# Altium PCB Backplane.PcbDoc
Units mil, origin at the board's own origin, x right, y up, seen from the top; angles counter-clockwise.
Board outline 5500 x 3340 mil, 2 copper layers (Top Layer, Bottom Layer); 5 components, 52 nets, 307 pads, 215 vias.
Unrouted connection lines stored in the file: 2.
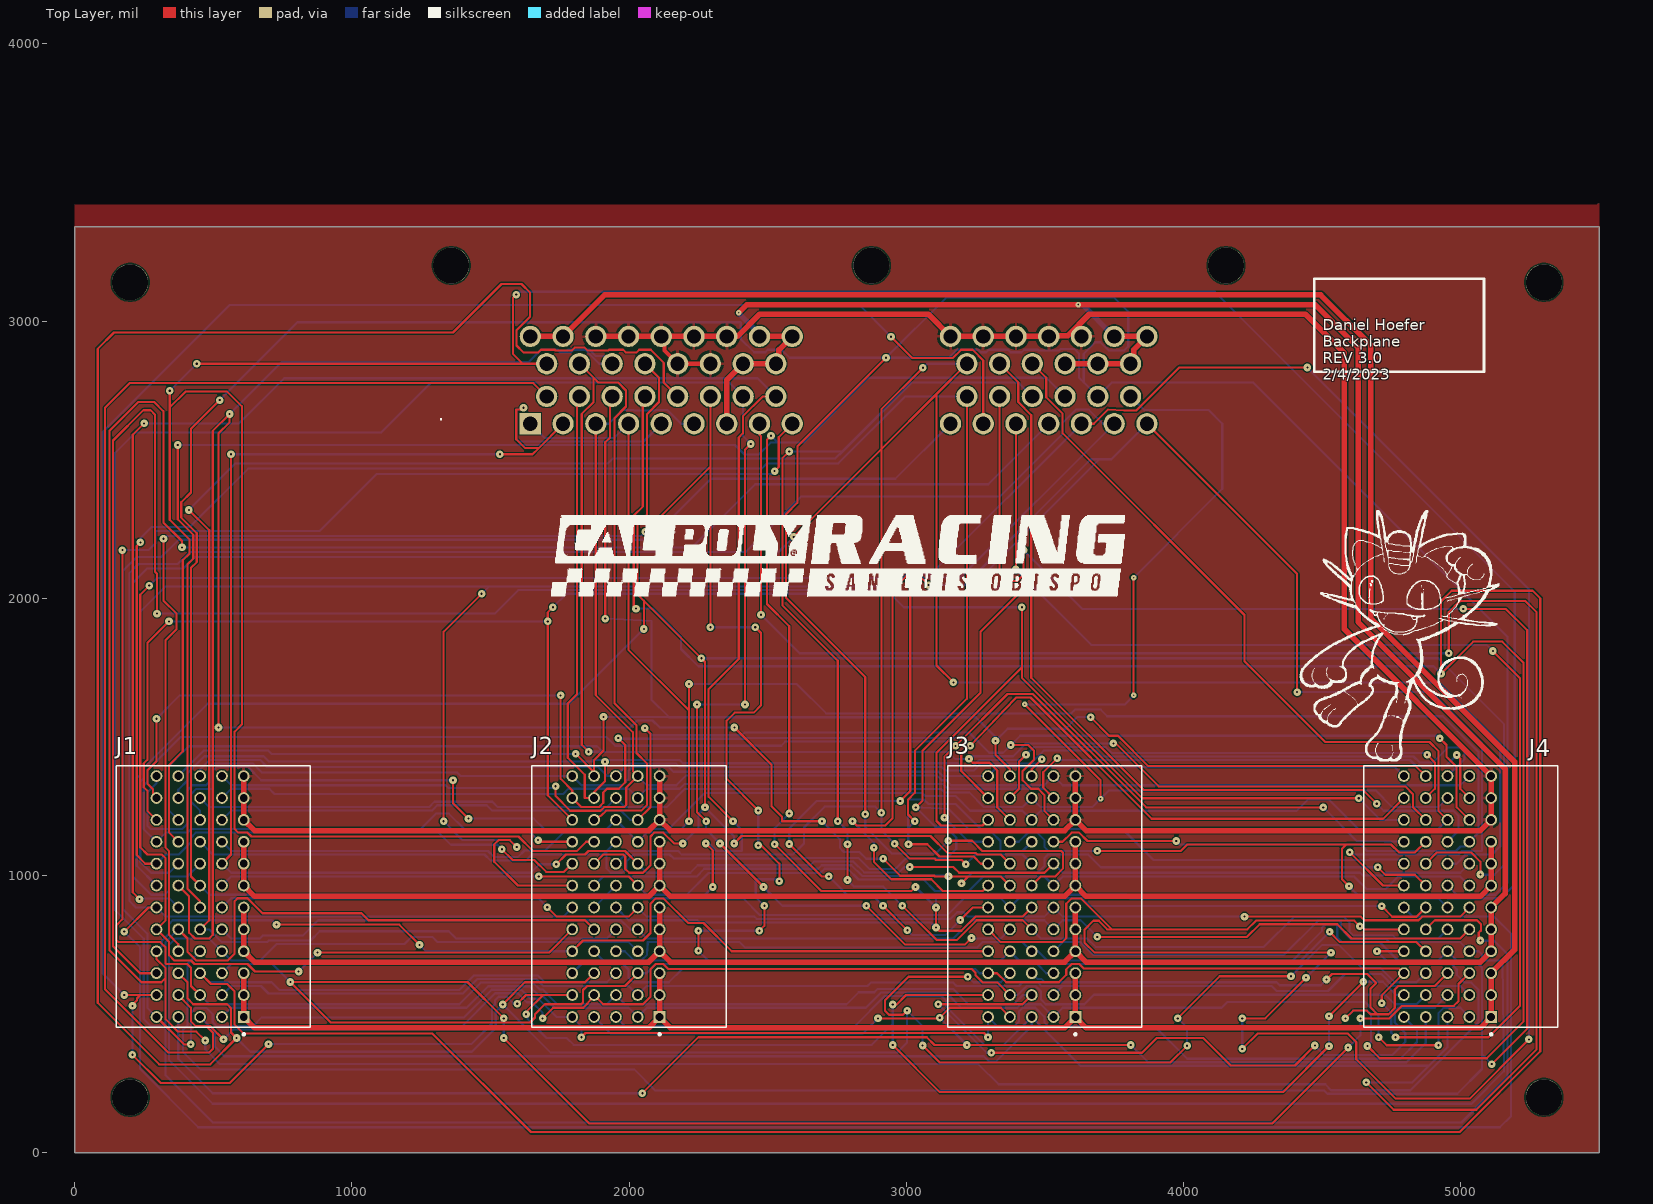
[diagram p0: Top Layer view]
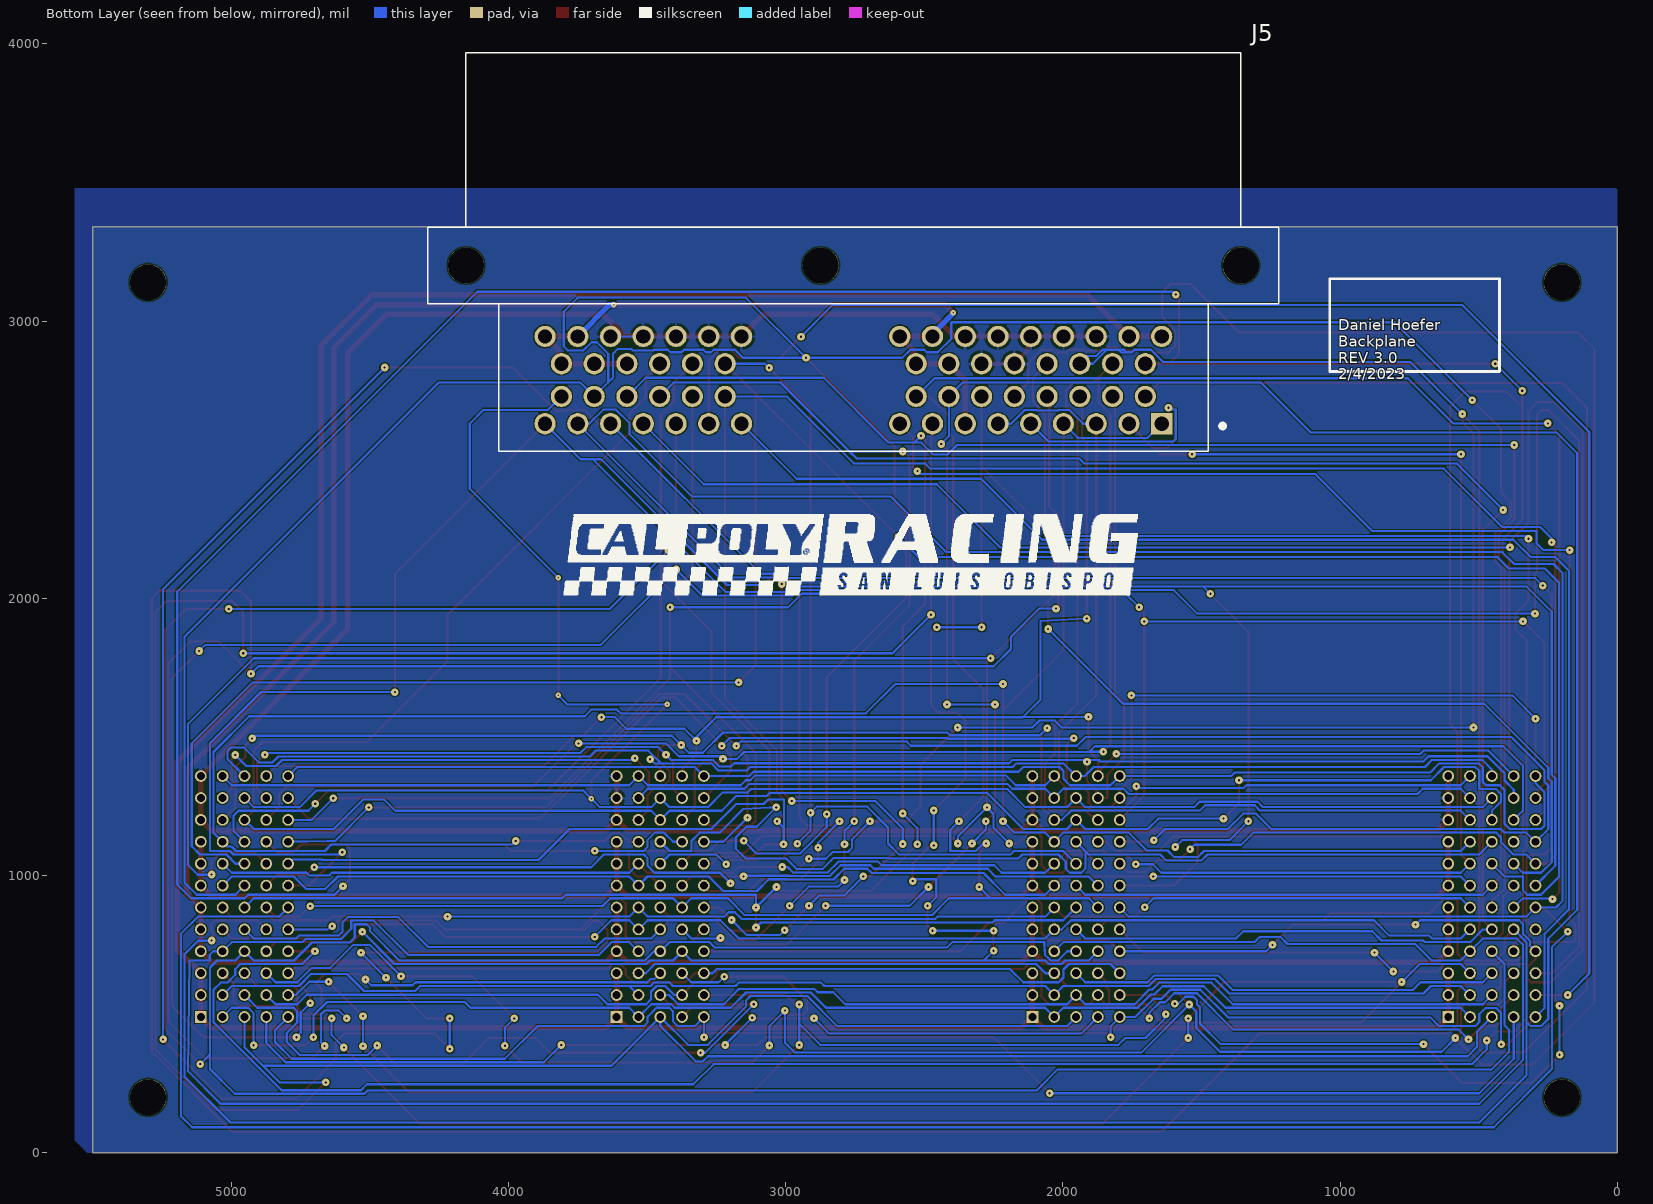
[diagram p1: Bottom Layer view, seen from below]

## Layer stack, top to bottom
Top Solder: solder mask 0.4, Solder Resist, Dk 3.5
Top Layer: signal copper 1.4
Dielectric 1: dielectric 12.6, FR-4, Dk 4.8
Bottom Layer: signal copper 1.4
Bottom Solder: solder mask 0.4, Solder Resist, Dk 3.5

## Board outline
0,0 0,3340 5500,3340 5500,0

## Design rules (kind name [scope] priority, off if disabled: settings)
Clearance [All] p1: gap=5 ignorepadtopadclearanceinfootprint=FALSE except(7.87: Arc-SMDPad Arc-THPad Track-SMDPad Track-THPad; 10: Arc-Via Track-Via; 12.99: Arc-Hole Track-Hole; 19.68: SMDPad-THPad THPad-THPad Via-Via Via-Hole)
ComponentClearance [All] p1: gap=5 collisioncheckmode=3 verticalgap=10 showdistances=FALSE
HoleSize [All] p1: absolutevalues=TRUE maxlimit=1200 minlimit=1 maxpercent=80.000 minpercent=20.000
PolygonConnect [All] p1: connectstyle=Relief reliefconductorwidth=10 reliefentries=4 polygonreliefangle="90 Angle" airgapwidth=10
RoomDefinition Backplane [InComponentClass('Backplane')] p1: confinementstyle=ConfineIn formatcopy=TRUE lockcomponents=FALSE outline 0,0 5515,0 5515,4040 0,4040
RoutingVias [All] p1: holewidth=7.87 width=27.56 viastyle="Through Hole" minholewidth=5.91 minwidth=19.68 maxholewidth=28 maxwidth=50
SilkToSilkClearance [All] p1: silktosilkclearance=5
SolderMaskExpansion [All] p1: expansion=4 istentingtop=FALSE
Width [All] p1: maxlimit=20 minlimit=5 preferedwidth=7.8 minimp=50.000000 maximp=50.000000 favimp=50.000000
27 further rules are at their usual default settings.

## Components (designator, comment, footprint, x,y, rotation, side; value= is the part's Value field where it differs from the comment)
J1 "5223002-2" TE_5223002-2 610,490 r270 top (schematic designator J2)
J2 "5223002-2" TE_5223002-2 2110,490 r270 top (schematic designator J3)
J3 "5223002-2" TE_5223002-2 3610,490 r270 top (schematic designator J1)
J4 "5223002-2" TE_5223002-2 5110,490 r270 top
J5 "6437288-3" TE_6437288-3 2874.02,3200.91 r0 bottom

## Footprints (in the part's own frame and the unit in brackets; to place one, negate y for a bottom-side part, rotate by r counter-clockwise, add the part's x,y. Pads: shape width x height; smd on the part's side, far side on the other; paste and mask are expansions set on the pad)
TE_5223002-2 [mm]
  rect 1.075x1.075 hole 0.725: 1(0,0)
  round 1.075 hole 0.725: 2(-2.007,0) 3(-4.013,0) 4(-6.02,0) 5(-8.026,0) 6(-10.033,0) 7(-12.04,0) 8(-14.046,0) 9(-16.053,0) 10(-18.059,0) 11(-20.066,0) 12(-22.073,0) 13(0,-2) 14(-2.007,-2) 15(-4.013,-2) 16(-6.02,-2) 17(-8.026,-2) 18(-10.033,-2) 19(-12.04,-2) 20(-14.046,-2) 21(-16.053,-2) 22(-18.059,-2) 23(-20.066,-2) 24(-22.073,-2) 25(0,-4) 26(-2.007,-4) 27(-4.013,-4) 28(-6.02,-4) 29(-8.026,-4) 30(-10.033,-4) 31(-12.04,-4) 32(-14.046,-4) 33(-16.053,-4) 34(-18.059,-4) 35(-20.066,-4) 36(-22.073,-4) 37(0,-6) 38(-2.007,-6) 39(-4.013,-6) 40(-6.02,-6) 41(-8.026,-6) 42(-10.033,-6) 43(-12.04,-6) 44(-14.046,-6) 45(-16.053,-6) 46(-18.059,-6) 47(-20.066,-6) 48(-22.073,-6) 49(0,-8) 50(-2.007,-8) 51(-4.013,-8) 52(-6.02,-8) 53(-8.026,-8) 54(-10.033,-8) 55(-12.04,-8) 56(-14.046,-8) 57(-16.053,-8) 58(-18.059,-8) 59(-20.066,-8) 60(-22.073,-8)
  silkscreen extent -23.01,-11.7 1.69,6.1
TE_6437288-3 [mm]
  rect 1.95x1.95 hole 1.3: 1(-31.25,14.5)
  round 1.95 hole 1.3: 2(-28.25,14.5) 3(-25.25,14.5) 4(-22.25,14.5) 5(-19.25,14.5) 6(-16.25,14.5) 7(-13.25,14.5) 8(-10.25,14.5) 9(-7.25,14.5) 10(-29.75,12) 11(-26.75,12) 12(-23.75,12) 13(-20.75,12) 14(-17.75,12) 15(-14.75,12) 16(-11.75,12) 17(-8.75,12) 18(-29.75,9) 19(-26.75,9) 20(-23.75,9) 21(-20.75,9) 22(-17.75,9) 23(-14.75,9) 24(-11.75,9) 25(-8.75,9) 26(-31.25,6.5) 27(-28.25,6.5) 28(-25.25,6.5) 29(-22.25,6.5) 30(-19.25,6.5) 31(-16.25,6.5) 32(-13.25,6.5) 33(-10.25,6.5) 34(-7.25,6.5) 35(7.25,14.5) 36(10.25,14.5) 37(13.25,14.5) 38(16.25,14.5) 39(19.25,14.5) 40(22.25,14.5) 41(25.25,14.5) 42(8.75,12) 43(11.75,12) 44(14.75,12) 45(17.75,12) 46(20.75,12) 47(23.75,12) 48(8.75,9) 49(11.75,9) 50(14.75,9) 51(17.75,9) 52(20.75,9) 53(23.75,9) 54(7.25,6.5) 55(10.25,6.5) 56(13.25,6.5) 57(16.25,6.5) 58(19.25,6.5) 59(22.25,6.5) 60(25.25,6.5)
  round 3.3 hole 3.3 unplated: ""(-38.5,0) ""(0,0) ""(32.5,0)
  silkscreen extent -42,-19.5 36,17

## Part data
J1 J2 J3 J4: Package=None, Availability=Unavailable, MP=5223002-2, Price=None
J5: "Rectangular Power Connector, Super Seal Series, Through Hole, Receptacle, 60, 1.5 mm, Pin", Package=None, EU_RoHS_Compliance=Compliant, MF="TE Connectivity", MP=6437288-3, SnapEDA_Link=https://www.snapeda.com/parts/6437288-3/TE%20Connectivity%20AMP%20Connectors/view-part/401864/?ref=snap, TE_purchase_URL=https://www.te.com/usa-en/product-6437288-3.html?te_bu=Cor&te_type=disp&te_campaign=seda_glo_cor-seda-global-disp-prtnr-fy19-seda-model-bom-cta_sma-317_1&elqCampaignId=32493

## Free pads (board coordinates)
  round 130 hole 130 unplated: 2(200,200) 2(200,3140) 2(5300,200) 2(5300,3140)

## Via types
v1: diameter 27.56, hole 7.87, Top Layer to Bottom Layer, 209 vias
v2: diameter 19.68, hole 5.91, Top Layer to Bottom Layer, 6 vias

## Nets (pads, with @x,y where several pads share a name; then routed paths per layer and width w, separated by ;. In a path a pad name is that pad's centre, name@x,y a point inside that pad or via, vN(x,y) a via of type N, cw(c..) or ccw(c..) an arc to the next point about the centre after c; other vN are vias at no path point)
3.3V: J1.7 J1.8 J1.9 J2.7 J2.8 J2.9 J3.7 J3.8 J3.9 J4.7 J4.8 J4.9 | length 5229.1
  Top Layer w20: J1.9 J1.8 J1.7 649.04,924.94 2070.96,924.94 J2.7 ; J2.9 J2.8 J2.7 ; J3.9 J3.8 J3.7 ; J4.9 J4.8 J4.7 5070.96,924.94 3649.04,924.94 J3.7 ; J2.7 2149.04,924.94 3570.96,924.94 J3.7
5V: J1.4 J1.5 J1.6 J2.4 J2.5 J2.6 J3.4 J3.5 J3.6 J4.4 J4.5 J4.6 J5.7 J5.24 J5.25 J5.33 J5.34 J5.51 J5.52 J5.53 J5.59 J5.60 | length 11172.2
  Top Layer w20: J1.4 649.04,687.93 2070.96,687.93 J2.4 2149.04,687.93 3570.96,687.93 J3.4 3649.04,687.93 5070.96,687.93 J4.4 ; J1.4 J1.5 J1.6 ; J2.4 J2.5 J2.6 ; J5.7 2352.36,2787.52 J5.24 J5.25 2540.23,2857.27 2540.23,2896.64 J5.34 J5.33 ; v2(2395,3030) 2425,3060 v2(3620,3060) 4475,3060 4630,2905 4630,1915 5160,1385 5160,935 J4.6 J4.5 J4.4 ; J5.51 J5.52 J5.53 3819.75,2857.27 3819.75,2896.64 J5.60 J5.59 ; J3.4 J3.5 J3.6
  Bottom Layer w20: v2(2395,3030) 2470.47,2954.53 J5.33 ; v2(3620,3060) 3635,3060 J5.59
8.4V: J1.1 J1.2 J1.3 J2.1 J2.2 J2.3 J3.1 J3.2 J3.3 J4.1 J4.2 J4.3 J5.26 J5.27 | length 10914.7
  Top Layer w20: J1.1 649.04,450.92 2070.96,450.92 J2.1 2149.04,450.92 3570.96,450.92 J3.1 3649.04,450.92 5070.96,450.92 J4.1 ; J1.1 J1.2 J1.3 ; J5.26 J5.27 1911.81,3095 4495,3095 4675,2915 4675,1930 5195,1410 5195,732.99 J4.3 J4.2 J4.1 ; J2.1 J2.2 J2.3 ; J3.1 J3.2 J3.3
GND: J1.10 J1.11 J1.12 J2.10 J2.11 J2.12 J3.10 J3.11 J3.12 J4.10 J4.11 J4.12 J5.22 J5.23 J5.28 J5.29 J5.30 J5.31 J5.32 J5.54 J5.55 J5.56 J5.57 J5.58 | length 10191.2
  Top Layer w15: J5.30 2127.96,2933.18 2127.96,2893.81 J5.22 J5.23
  Top Layer w20: J1.12 J1.11 J1.10 649.04,1161.95 2070.96,1161.95 J2.10 ; J5.28 J5.29 J5.30 J5.31 J5.32 2390.91,2945 2470.91,3025 3079.45,3025 J5.54 J5.55 J5.56 J5.57 3515.95,2947.17 3582.17,2947.17 3660,3025 4440,3025 4580,2885 4580,1889.02 J4.12 J4.11 J4.10 5070.96,1161.95 3649.04,1161.95 J3.10 ; J2.12 J2.11 J2.10 ; J3.12 J3.11 J3.10 ; J2.10 2149.04,1161.95 3570.96,1161.95 J3.10
  Bottom Layer w7.8: J5.57 J5.58
NetJ1_13: J1.13 J2.13 J3.13 J4.13 | length 4945.6
  Top Layer w7.8: v1(4704,417) 4732.87,388.13 v1(4919.58,388.13)
  Bottom Layer w7.8: J1.13 564.26,523 1413.42,523 1491.5,601.08 1639.84,601.08 1670.09,570.83 1683.13,570.83 1730.96,523 1998.26,523 J2.13 2064.46,523.2 2854.64,523.2 2909.92,578.48 3143.44,578.48 3198.72,523.2 3400.54,523.2 3413.14,535.8 3485.46,535.8 J3.13 3564.26,523 4137,523 4158,544 4655,544 4704,495 v1(4704,417) ; v1(4919.58,388.13) 4919.58,503.64 4938.94,523 4998.26,523 J4.13
NetJ1_14: J1.14 J2.14 J3.14 J4.14 | length 4715.3
  Bottom Layer w7.8: J1.14 564.24,602 672,602 699.21,574.79 1400.43,574.79 1452.32,626.68 1665.44,626.68 1690.12,602 1998.28,602 J2.14 2064.24,602 2860.24,602 2872.12,613.88 3169.2,613.88 3181.08,602 3406.78,602 3419.54,614.75 3473.76,614.75 3486.51,602 3564.24,602 ; J3.14 3564.24,602 ; J4.14 4998.28,602 4756.08,602 4713.34,644.74 4582.45,644.74 4521.38,583.67 4336.8,583.67 4318.46,602 3564.24,602
NetJ1_15: J1.15 J2.15 J3.15 J4.15 | length 8038.5
  Top Layer w7.8: v1(1548,414) 1856,106 4319.88,106 v1(4593.88,380) ; v1(1548,485) 1417,616 v1(778,616) 924,470 1642.5,470 1660.32,487.82 1660.32,500.32 1696.08,536.08 1828,536.08 1834,542.08 1834,587.5 1848.5,602 1985.27,602 J2.15 ; v1(4638,485) 4743,485 4788,530 4975,530 4992.27,547.27 4992.27,609 J4.15
  Bottom Layer w7.8: J1.15 564.27,681 713,681 v1(778,616) ; v1(1548,414) v1(1548,485) ; J2.15 2062.99,647.99 2096,681 3472.17,681 3505.17,647.99 J3.15 ; v1(4593.88,380) 4638,424.12 v1(4638,485)
NetJ1_16: J1.16 J2.16 J3.16 J4.16 | length 9326.4
  Bottom Layer w7.8: J2.16 1998.27,760 1309,760 1290,779 1216,779 1190,753 729,753 670,694 564.27,694 J1.16 485.52,772.74 362.5,772.74 340.84,751.09 340.84,334.24 498.09,177 5039,177 5155.8,293.8 5150.53,694.07 5078,694.07 5078,714 5064.99,727.01 J4.16 4998.27,760 4743.48,760 4731.96,771.52 4603.76,771.52 4567.48,807.8 4567.48,837.48 4486.07,837.48 4362.11,713.52 3675,713.52 3628.52,760 3564.25,760 J3.16
NetJ1_17: J1.17 J2.17 J3.17 J4.17 | length 4702.3
  Top Layer w7.8: v1(3689,779) 4228.89,779 4274.57,824.68 4554.68,824.68 4606.36,773 4998.28,773 J4.17
  Bottom Layer w7.8: J1.17 564.24,773 668,773 678.44,783.44 822.44,783.44 878,839 1971,839 2004.02,805.98 J2.17 2064.24,773 2411.81,773 2412.29,772.52 3147,772.52 3147.87,773.39 3170.39,773.39 3236,839 3498.24,839 J3.17 3564.28,839 3629,839 v1(3689,779)
NetJ1_18: J1.18 J2.18 J3.18 J4.18 | length 4640.1
  Top Layer w7.8: v1(1705,886) 1739,852 1998.26,852 J2.18 ; v1(4220,852) 4640,852 4653.08,838.92 4848,838.92 4861.08,852 4998.26,852 J4.18
  Bottom Layer w7.8: J1.18 564.26,918 1673,918 v1(1705,886) ; J2.18 2064.26,852 2452,852 2460,844 3159.74,844 3183.75,868.01 3206.22,868.01 3222.23,852 3498.26,852 J3.18 3564.26,852 v1(4220,852)
NetJ1_19: J1.19 J2.19 J3.19 J4.19 | length 4714.2
  Top Layer w7.8: v1(1674,997) 1998.28,997 J2.19
  Bottom Layer w7.8: J1.19 564.24,997 v1(1674,997) ; J2.19 2064.28,931 2208.32,931 2286.53,1009.21 2689.85,1009.21 2705.32,1024.68 2788.99,1024.68 2827.75,985.92 2999.13,985.92 2999.89,986.68 3061,986.68 3103.36,944.32 3224.88,944.32 3277.56,997 3498.28,997 J3.19 3564.24,997 4615.04,997 4660.52,951.52 4729.52,951.52 4775,997 4998.28,997 J4.19
NetJ1_20: J1.20 J2.20 J3.20 J4.20 J5.2 J5.5 | length 8330.1
  Top Layer w7.8: J1.20 564.2,1075.93 564.2,2519.8 v1(564,2520) ; v1(1534,2520) 1651.77,2520 1673.77,2542 ; v1(1619,2688) 1612,2681 1593,2681 1593,2574 1625,2542 1673.77,2542 ; v1(1737,1041) 1772.27,1076.27 1840.78,1076.27 1853.5,1089 1985.25,1089 J2.20 ; J5.2 1673.77,2542 ; v1(3012.76,1031) 3169.78,1031 3190.78,1010 3498.27,1010 J3.20
  Bottom Layer w7.8: J1.20 564.25,1010 1644.72,1010 1675.72,1041 v1(1737,1041) ; v1(564,2520) v1(1534,2520) ; v1(1619,2688) 1612,2681 1593,2681 1593,2575 1601.8,2566.2 2052.3,2566.2 J5.5 ; J2.20 2064.25,1010 2220.4,1010 2247.68,1037.28 2653.72,1037.28 2666.72,1050.28 2809.79,1050.28 2848.55,1011.52 2974.29,1011.52 2993.77,1031 v1(3012.76,1031) ; J3.20 3564.25,1010 4637.32,1010 4647.32,1000 4718.68,1000 4728.68,1010 4998.27,1010 J4.20
NetJ1_21: J1.21 J2.21 J3.21 J4.21 J5.1 J5.4 | length 8658
  Top Layer w7.8: J5.4 1998.03,1991.85 1997.32,1991.14 1997.32,1814.68 2216,1596 ; v1(2216,1196) 2216,1596 ; v1(2216,1691) 2216,1596 ; J3.21 3563.42,1122.01 3596.36,1154.94 3623.64,1154.94 3653.59,1125 v1(3974,1125)
  Bottom Layer w7.8: J1.21 564.27,1089 1491.29,1089 1513.64,1066.65 1598.57,1066.65 1622.68,1090.75 1697.75,1090.75 1762,1155 1998.27,1155 J2.21 2064.25,1155 2175,1155 v1(2216,1196) ; J5.1 1694.74,2579 1946.99,2579 J5.4 ; v1(2216,1691) 2605,1691 2710.72,1585.28 3595.28,1585.28 3608.68,1598.68 3701.32,1598.68 3725,1575 4935,1575 5064.2,1445.8 5064.2,1154.94 J4.21 5014.25,1105 4999,1105 4983,1089 4662.18,1089 4639,1112.18 3986.82,1112.18 v1(3974,1125)
NetJ1_22: J1.22 J2.22 J3.22 J4.22 | length 5601.9
  Top Layer w7.8: J2.22 2077.06,1246.79 2077.06,1511.94 v1(2057,1532) ; v1(3377,1471) 3439.5,1471 3460.5,1450 3460.5,1418.39 3419.58,1377.47 3419.58,1343.42 3450,1313 3476,1313 3498,1291 3498,1234.24 J3.22 ; v1(4925,1495) 4949,1471 4949,1428.46 4985.46,1392 4985.46,1246.79 J4.22
  Bottom Layer w7.8: J1.22 564.54,1234.26 1288.75,1234.26 1308.16,1253.68 1486.92,1253.68 1506.34,1234.26 1970.72,1234.26 2004,1200.98 J2.22 ; v1(2057,1532) 2082.68,1506.32 2407,1506.32 2416.68,1516 3226,1516 3298.8,1443.2 3349.2,1443.2 v1(3377,1471) 3410.68,1504.68 4915.32,1504.68 v1(4925,1495)
NetJ1_23: J1.23 J2.23 J3.23 J4.23 | length 4907.7
  Top Layer w7.8: J3.23 3494,1317.26 3494,1373 v1(3544,1423) ; v1(4986.01,1434.99) 4998.26,1422.74 4998.26,1313 J4.23
  Bottom Layer w7.8: J1.23 564.26,1313 702,1313 720.87,1294.13 1762,1294.13 1780.87,1313 1998.26,1313 J2.23 2064.26,1313 2183.24,1313 2201.12,1330.88 3131.88,1330.88 3149.76,1313 3498.26,1313 J3.23 ; v1(3544,1423) 3550.12,1416.88 4817.16,1416.88 4838.52,1395.52 4946.54,1395.52 v1(4986.01,1434.99)
NetJ1_24: J1.24 J2.24 J3.24 J4.24 J5.3 J5.6 | length 6481.2
  Top Layer w7.8: v1(1735,1322) 1735,1287 1788,1234 1897,1234 1910.06,1247.06 1982.06,1247.06 1990,1255 1990,1317.76 J2.24 2013.65,1376.63 2013.65,1517.35 1879.92,1651.08 J5.3
  Bottom Layer w7.8: J1.24 564.28,1326 1337.75,1326 1347.43,1316.32 1729.32,1316.32 v1(1735,1322) ; J5.3 1927.09,2630.04 1977.25,2680.2 2016.8,2680.2 2019,2678 2093.16,2678 2095.36,2680.2 2136.92,2680.2 2187.08,2630.04 J5.6 ; J2.24 2064.28,1326 2170.64,1326 2206.27,1361.63 3109.42,1361.63 3127.37,1343.68 3144.68,1343.68 3162.36,1326 3498.24,1326 J3.24 3564.28,1326 4998.24,1326 J4.24
NetJ1_25: J1.25 J2.25 J3.25 J4.25 J5.8 | length 12883.5
  Top Layer w7.8: J5.8 2470.47,2591 2476,2585.47 v1(2476,1941) ; v1(4659,254) 4758,155 5056,155 5274,373 5274,1950 5233.32,1990.68 4997.68,1990.68 4957,1950 v1(4957,1802)
  Bottom Layer w7.8: J1.25 506,436.52 506,382 539.48,348.52 3279.59,348.52 3298.28,329.83 3325,329.83 3452.52,457.35 J3.25 ; J2.25 1985.52,457 2814.04,457 2922.72,565.68 3127,565.68 3142.68,550 3142.68,528.32 3281.68,389.32 3351.84,389.32 J3.25 ; v1(2476,1941) 2615,1802 v1(4957,1802) ; v1(4659,254) 4826,254 4885.92,313.92 ; J4.25 4952.52,380.52 4885.92,313.92 ; J3.25 3628.6,313.92 4885.92,313.92
NetJ1_26: J1.26 J2.26 J3.26 J4.26 J5.9 | length 10305.9
  Top Layer w7.8: v1(172,2174) 172,842.68 151.32,822 151.32,766.62 158,759.94 308.68,759.94 327.98,740.65 327.98,683.63 330.67,680.93 406.66,680.93 419.58,668 419.58,601.95 J1.26 ; v1(2525,2459) 2540,2474 2540,2581.46 J5.9 ; v1(3115,536) 3419.5,536 J3.26 ; v1(3307,361) 3850,361 3903,414 4071,414 4170,315 4402,315 v1(4474,387)
  Bottom Layer w7.8: v1(172,2174) 266,2174 292,2200 292,2243 884,2243 1090,2449 2515,2449 v1(2525,2459) ; J1.26 485.54,536 1387.24,536 1465.12,613.88 1652.64,613.88 1677.64,588.88 1688.4,588.88 1741.28,536 1919.5,536 J2.26 1985.54,536 2784.9,536 2827.98,579.08 2884.92,579.08 2897.12,591.28 3168.44,591.28 3223.72,536 3387.74,536 3420.76,569.02 J3.26 ; v1(3115,536) 3290,361 v1(3307,361) ; v1(4474,387) 4508.68,352.32 4752.32,352.32 4800,400 4800,432 4762.1,469.9 4762.1,510.1 4775,523 4906.5,523 J4.26
NetJ1_27: J1.27 J2.27 J3.27 J4.27 J5.13 | length 17375.8
  Top Layer w7.8: J1.27 491.51,609 550,609 577,582 577,462.5 609.5,430 1291,430 1646,75 4996,75 5287,366 5287,2000 5259.52,2027.48 4967.48,2027.48 4929,1989 v1(4929,1728) 5045,1844 5150,1844 5227,1767 5227,474 5094.32,341.32 4707.68,341.32 v1(4663.5,385.5) ; v1(2025,1963) 2017,1971 2017,2299 2049,2331 2049,2702 2057.09,2702 J5.13 ; v1(4516,625) 4535.74,644.74 4662.76,644.74 4695,612.5 4674.5,592 4674.5,525 4699.5,500 ; v1(4584,485) 4612,513 4661.5,513 4674.5,500 4699.5,500 ; J4.27 4906.53,602 4775,602 4762,589 4762,522.1 4739.9,500 4699.5,500
  Bottom Layer w7.8: J1.27 485.51,615 710.09,615 737.5,587.59 1387.63,587.59 1439.52,639.48 1670.88,639.48 1695.36,615 1919.53,615 J2.27 ; v1(2025,1963) 2086.68,1963 2187.5,1862.18 2187.5,1817.5 2250,1755 4902,1755 v1(4929,1728) ; J3.27 3472.96,627.55 3486.76,627.55 3499.31,615 4335.62,615 4346.3,604.32 4495.32,604.32 v1(4516,625) ; v1(4584,485) 4612,513 4664,513 4676.32,500.68 4676.32,398.32 v1(4663.5,385.5)
NetJ1_28: J1.28 J2.28 J3.28 J4.28 J5.43 | length 13390
  Top Layer w7.8: J5.43 3336.61,2096.39 3370.2,2062.8 3400,2062.8 3423,2085.8 v1(3423,2174) ; v1(5009,1962) 5163,1962 5240,1885 5240,448 v1(5112,320)
  Bottom Layer w7.8: J1.28 406.78,681.27 406.78,459.73 391.32,444.26 391.32,363.04 453.39,300.97 2018.17,300.97 2094.13,225 4507.62,225 4519.64,212.99 4987.99,212.99 5077,302 5077,355 ; J2.28 1984.14,727.01 2017.08,694.07 2045.06,694.07 2065,714.01 2067.4,760 2398.89,760 2418.89,740 3255,740 3275,760 3419.53,760 J3.28 3475,727.01 3508.01,694 4393.64,694 4499.32,799.68 4499.32,811.5 4512.5,824.68 4554.68,824.68 4554.68,776.76 4572.72,758.72 4708.97,758.72 4773.69,694 4919.51,694 J4.28 4985.53,694 5051.54,694 5077,668.54 5077,355 ; v1(3423,2174) 3635,1962 v1(5009,1962) ; v1(5112,320) 5077,355
NetJ1_29: J1.29 J2.29 J3.29 J4.29 J5.44 | length 10649.5
  Top Layer w7.8: v1(412,2319) 485.46,2245.54 485.46,838.92 J1.29 ; v1(2578,2530) 2553,2505 2553,1974.83 2753,1774.83 v1(2753,1196) ; v1(2788,983.97) v1(2788,1113) ; v1(2985.99,891) 3108.99,768 3183.5,768 3254.42,838.92 3419.58,838.92 J3.29
  Bottom Layer w7.8: v1(412,2319) 580,2487 1924,2487 1942,2505 2744.91,2505 2769.91,2530 ; J1.29 484.68,805.98 530.66,760 695,760 701,766 851,766 884,799 1350,799 1376,773 1919.54,773 J2.29 ; v1(2578,2530) 2769.91,2530 ; v1(2753,1196) 2788,1161 v1(2788,1113) ; v1(2788,983.97) 2811.65,960.32 2916.67,960.32 v1(2985.99,891) ; J3.29 3485.5,773 3653.32,773 3683.32,743 4290.63,743 4397.91,850.28 4580.28,850.28 4598.32,832.24 4598.32,798.5 4612.5,784.32 4754.68,784.32 4766,773 4919.54,773 J4.29 ; J5.44 3404.19,2779 3018.91,2779 2769.91,2530
NetJ1_30: J1.30 J2.30 J3.30 J4.30 J5.45 | length 10889.3
  Top Layer w7.8: v1(371.52,2553.4) 371.52,2285.06 427.48,2229.1 427.48,2143.52 406.72,2122.76 406.72,952.6 452.52,906.79 J1.30 ; v1(2512,2587) 2497.32,2572.32 2497.32,1980.04 2578,1899.36 v1(2578,1224) ; v1(2525,1113) 2694,944 3018,944 v1(3033,959) ; v1(3107,885) v1(3107,813) 3118.99,801.01 3198.4,801.01 3249.39,852 3419.52,852 J3.30
  Bottom Layer w7.8: v1(371.52,2553.4) 2382.24,2553.4 2416.64,2519 2468,2519 2511,2562 2537,2562 ; J2.30 1998.52,839 2246.4,839 2254.71,830.69 3089.31,830.69 v1(3107,813) ; v1(2512,2587) 2537,2562 ; v1(2525,1113) 2525,1171 v1(2578,1224) ; v1(3033,959) v1(3107,885) 3107,931 3794,931 3807,918 4919.52,918 J4.30 ; J5.45 3505.3,2796 2863,2796 2629,2562 2537,2562
NetJ1_31: J1.31 J2.31 J3.31 J4.31 J5.46 | length 14280.1
  Top Layer w7.8: J1.31 419.52,997.02 419.52,2109.96 440.28,2130.72 440.28,2235.36 384.32,2291.32 384.32,2346.68 419.52,2381.88 419.52,2611.52 v1(523.43,2715.43) ; v1(2851.74,1221) 2851.74,1716.37 2566,2002.11 2566,2304 2607,2345 2607,2548 v1(2927,2868) ; v1(3151.52,1125.48) 3237.63,1125.48 3274.11,1089 3559,1089 3565,1083 3565,1025 3537,997 3485.5,997 J3.31
  Bottom Layer w7.8: J1.31 485.54,931 1919.5,931 J2.31 ; v1(523.43,2715.43) 804,2996 2402,2996 2403,2995 2403,2936 2451,2888 2491,2888 2500,2897 2550.04,2897 2579.04,2868 v1(2927,2868) ; v1(2851.74,1221) 2851.74,1175.88 2947.94,1079.68 3105.72,1079.68 v1(3151.52,1125.48) ; J4.31 4985.54,931 5125,931 5168.54,974.54 5168.54,1862.01 4251.54,2779 3741.48,2779 J5.46 3640,2779.41 ; v1(2927,2868) 3154,2868 3183,2897 3260,2897 3269,2888 3288,2888 3297,2897 3367,2897 3376,2888 3416,2888 3425,2897 3475.24,2897 3477.4,2894.84 3552.79,2894.84 3557.95,2900 3605.95,2900 3622.99,2882.96 3622.99,2796.41 3640,2779.41 ; v1(2927,2868) 3144,3085 3750,3085 3801,3034 3801,2909.46 3786.38,2894.84 3729.22,2894.84 3700.06,2924 3681.83,2924 3640,2882.17 3640,2779.41
NetJ1_32: J1.32 J2.32 J3.32 J4.32 J5.48 | length 12071.1
  Top Layer w7.8: v1(2593.93,2222) 2910,2538.07 ; v1(2910,1227) 2910,2538.07 ; v1(2958,1115) 3011,1062 3101.71,1062 3107.42,1056.29 3199.71,1056.29 v1(3215,1041) ; v1(3060,2832) 2910,2682 2910,2538.07 ; v1(3170,1697) 3109,1758 3109,2737.07 ; J5.48 3109,2737.07 ; 2910,2538.07 3109,2737.07
  Bottom Layer w7.8: J1.32 406.73,997.2 340.78,997.2 340.78,946.78 325,931 275,931 210.9,995.1 210.9,2057.08 261.44,2107.62 391.58,2107.62 432.96,2149 2520.93,2149 v1(2593.93,2222) ; J2.32 1998.53,1089 2177.03,1089 2190.51,1075.52 2590.2,1075.52 2630.68,1116 2630.68,1173.52 2705.84,1248.68 2888.32,1248.68 v1(2910,1227) 2910,1163 v1(2958,1115) ; v1(3060,2832) 3074.57,2846.57 J5.48 ; v1(3170,1697) 4923,1697 5142.94,1477.06 5142.94,1105.94 5112.93,1075.93 5017.62,1075.93 4984.68,1042.99 J4.32 ; v1(3215,1041) 3250,1076 3419.51,1076 J3.32
NetJ1_33: J1.33 J2.33 J3.33 J4.33 J5.49 | length 7757.3
  Top Layer w7.8: v1(3034,1246) 3059,1271 3059,1451 3268,1660 3268,1880 3451,2063 ; J5.49 3404,2779.19 3404,2708.25 3451,2661.25 3451,2063 ; v1(4697,1259) 4646.87,1309.13 3855.5,1309.13 3451,1713.64 3451,2063
  Bottom Layer w7.8: J1.33 498.53,1076 1478.69,1076 1500.84,1053.85 1626.81,1053.85 1648.96,1076 1906.51,1076 1919,1088.49 ; J2.33 1919,1088.49 ; J3.33 3419.51,1089 3340,1089 3340,1125 3310,1155 3238.2,1155 3153.07,1240.13 3059,1246 v1(3034,1246) 3103.95,1176.05 3141.45,1176.05 3180,1137.5 3180,1097 3145,1062 2998.68,1062 2961,1024.32 2866.68,1024.32 2827,1064 2629,1064 2627,1062 2160,1062 2146,1076 2016,1076 1990,1050 1990,1025 1975,1010 1934,1010 1919,1025 1919,1088.49 ; v1(4697,1259) 4722,1234 4974,1234 4992,1216 4992,1161.49 J4.33
NetJ1_34: J1.34 J2.34 J3.34 J4.34 J5.50 | length 7554.9
  Top Layer w7.8: v1(1365,1344) 1365,1261.33 v1(1420.88,1205.45) ; J5.50 3505,2796.3 3505,2725.36 3564,2666.36 3564,2596 4220,1940 4220,1773 4511,1482 4887.52,1482 4919.52,1450 4919.52,1233.99 J4.34
  Bottom Layer w7.8: J1.34 452.52,1233.42 419.58,1266.36 419.58,1293.64 438.88,1312.94 498.32,1312.94 498.32,1377.78 512.5,1391.95 625.05,1391.95 673,1344 v1(1365,1344) ; v1(1420.88,1205.45) 1656.55,1205.45 1694,1168 1919.54,1168 J2.34 1985.5,1168 2143,1168 2273,1298 3057,1298 3068,1287 3178,1287 3231,1234 3419.5,1234 J3.34 3485.54,1234 4408,1234 4448,1274 4525,1274 4631,1168 4919.54,1168 J4.34
NetJ1_35: J1.35 J2.35 J3.35 J4.35 J5.47 | length 7045.8
  Top Layer w7.8: v2(3427.5,1617.5) 3700.84,1344.16 v2(3700.84,1276.84) ; v2(3820,1650) v2(3820,2075)
  Bottom Layer w7.8: J1.35 485.46,1247.06 1278.16,1247.06 1297.58,1266.48 1507.25,1266.48 1526.67,1247.06 1919.58,1247.06 J2.35 1985.52,1247 2135.48,1247 2200.56,1312.08 3125.08,1312.08 3137.08,1300.08 3226.95,1300.08 3280.03,1247 3419.52,1247 J3.35 3485.52,1247 3671,1247 v2(3700.84,1276.84) 3730.68,1306.68 4693.32,1306.68 4753,1247 4919.52,1247 J4.35 ; v2(3427.5,1617.5) 3787.5,1617.5 v2(3820,1650) ; J5.47 3857.32,2680.2 4090.23,2680.2 4140,2630.43 4140,2395 v2(3820,2075)
NetJ1_36: J1.36 J2.36 J3.36 J4.36 | length 4965.8
  Top Layer w7.8: J3.36 3452.52,1383.52 v1(3489,1420)
  Bottom Layer w7.8: J1.36 452.52,1382.57 487.5,1417.55 668.54,1417.55 694.09,1392 1888.46,1392 1921.44,1359.02 J2.36 1998.26,1404.75 2168.58,1404.75 2181.34,1392 3128,1392 3141,1379 3243.08,1379 3268.88,1404.8 3450,1404.8 ; v1(3489,1420) 3473.8,1404.8 3450,1404.8 ; J4.36 5013.69,1420.18 5013.69,1450 5001.02,1462.67 4955.35,1462.67 4901,1408.32 4851.32,1408.32 4829.96,1429.68 3706.88,1429.68 3685.89,1450.68 3495.88,1450.68 3450,1404.8
NetJ1_37: J1.37 J2.37 J3.37 J4.37 | length 6661.7
  Top Layer w7.8: v1(2048,215) 2250,417 3074,417 3102,389 v1(3218.75,389) v1(3810,389) ; v1(2898,485) 3118.45,485 v1(3120.6,487.15) 3156.45,523 3340.78,523 J3.37
  Bottom Layer w7.8: J1.37 373.78,339.22 498,215 v1(2048,215) ; J2.37 1933.78,430 2843,430 v1(2898,485) ; v1(3120.6,487.15) v1(3218.75,389) ; v1(3810,389) 3872.28,326.72 4804.24,326.72 4873.78,396.26 J4.37
NetJ1_38: J1.38 J2.38 J3.38 J4.38 J5.10 | length 9363.6
  Top Layer w7.8: J1.38 419,523.8 419,475 437,457 474.36,457 ; v1(537,409) 489,457 474.36,457 ; v1(1688,485) 1726.28,523.28 1834.87,523.28 1849.09,537.5 J2.38 1906.8,536 2050,536 2077.06,563.06 2077.06,661.64 2096.36,680.93 2123.64,680.93 2141.89,662.68 3237,662.68 3249.68,650 3249.68,640.07 3275,614.75 3328.04,614.75 J3.38 ; J5.10 1654.54,2776.68 197.68,2776.68 109.12,2688.12 109.12,590.01 337.48,361.66 485.34,361.66 498.68,375 498.68,432.68 474.36,457
  Bottom Layer w7.8: v1(537,409) 572.26,444.26 1385.28,444.26 1516.5,575.48 1598.88,575.48 1631.18,543.18 1650,543.18 1688,505.18 v1(1688,485) ; J3.38 3401.52,569.02 3434.45,601.95 3466.16,601.95 3486,582.12 3486,553.36 3503.36,536 3643,536 3677,570 4728,570 4762,536 4840.76,536 J4.38
NetJ1_39: J1.39 J2.39 J3.39 J4.39 J5.14 | length 12092.1
  Top Layer w7.8: J1.39 406.78,614.99 406.78,557.22 428,536 550,536 564.2,521.8 564.2,433.8 v1(584,414) 489,319 305,319 83,541 83,2900 142,2959 1365,2959 1540,3134 1612,3134 1643,3103 1643,3017 1593.54,2967.54 1593.54,2912.5 1618.54,2887.5 1672.74,2887.5 1681.98,2896.73 1732,2896.73 1734.73,2894 1793.19,2894 1803.73,2904.53 1839.76,2904.53 1849.45,2894.84 1925,2894.84 1927.16,2897 1978.57,2897 1988.07,2887.5 2027.07,2887.5 2036.31,2896.73 2077.86,2896.73 2125,2849.6 2125,2778.66 J5.14 ; v1(1544,535) 1624,615 1840.79,615 J2.39 ; v1(3003,513) 2988,498 2937.5,498 2923,512.5 2923,550 3008,635 v1(3222,635) ; v1(3059,387) 3119.93,326.07 3953.07,326.07 v1(4013,386) ; v1(3979,485) 4131,637 v1(4388,637)
  Bottom Layer w7.8: v1(584,414) 633.68,364.32 1433.32,364.32 1519,450 1519,510 v1(1544,535) 1717.68,361.32 2966.32,361.32 3003,398 v1(3003,513) 3059,457 v1(3059,387) ; v1(3222,635) 3242,615 3340.79,615 J3.39 ; v1(3979,485) 4013,451 v1(4013,386) ; v1(4388,637) 4501,750 4560,750 4643,667 4710,667 4762,615 4840.79,615 J4.39
NetJ1_40: J1.40 J2.40 J3.40 J4.40 J5.15 | length 9488.4
  Top Layer w7.8: v1(320.4,2215) 320.4,1991.96 367.68,1944.68 367.68,1889.32 328,1849.64 328,1100.84 340.84,1088 340.84,785.54 373.78,752.61 J1.40 ; v1(2058,2240) 2293.31,2475.31 ; v1(2250,729) v1(2250,801) ; v1(2293.31,1896) 2293.31,2475.31 ; J5.15 2293.31,2475.31 ; v1(2455,1896) 2476,1875 2476,1614 2450,1588 2381,1588 2352,1559 2352,1349 v1(2466,1235) ; v1(2466,1109) 2475.67,1109 2542,1042.67 v1(2542,980) ; v1(2470,801) 2488,819 v1(2488,891) ; v1(4527,797) 4564,760 4840.79,760 J4.40
  Bottom Layer w7.8: v1(320.4,2215) 329.88,2224.48 2042.48,2224.48 v1(2058,2240) ; J2.40 1906.79,694 1991.83,694 2004.56,681.27 2050.91,681.27 2063.64,694 2285,694 ; v1(2250,729) 2285,694 ; v1(2250,801) v1(2470,801) ; v1(2293.31,1896) v1(2455,1896) ; v1(2466,1109) v1(2466,1235) ; v1(2488,891) 2457,922 2457,987 2535,987 v1(2542,980) ; v1(4527,797) 4411,681 3502.91,681 3489.91,694 3406.79,694 J3.40 3340.77,694 2285,694
NetJ1_41: J1.41 J2.41 J3.41 J4.41 J5.16 | length 15833.1
  Top Layer w7.8: J1.41 406.78,772.98 406.78,725.22 438,694 552,694 577,719 577,907.5 587.5,918 623.58,918 677.52,864.06 1034.77,864.06 1059.91,838.92 1840.84,838.92 J2.41 ; v1(2245,1617) 2245,1229 v1(2278,1196) ; v1(2328,1116) v1(2485,959) ; v1(2418,1617) 2418,2536.45 2438.55,2557 v1(2439,2557) ; v1(2856,891) 2996,751 3211,751 v1(3235,775) ; J4.41 4906.8,839 5059.1,839 5073.1,825 5073.1,801.73 5065,793.62 v1@5065,765
  Bottom Layer w7.8: J1.41 328,760.2 328,472.5 ; v1(2245,1617) v1(2418,1617) ; v1(2278,1196) 2278,1166 v1(2328,1116) ; v1(2439,2557) 2411.42,2584.58 J5.16 2360.88,2779 1286,2779 1105,2598 219,2598 144.3,2523.3 144.3,877 249.3,772 249.3,482.7 275,457 312.5,457 328,472.5 ; v1(2485,959) 2553,891 v1(2856,891) ; v1(3235,775) 3237,773 3340.8,773 J3.41 ; v1@5065,765 5120,765 5168.6,716.4 5168.6,274.4 5003.2,109 497.54,109 328,278.54 328,472.5
  other v1: 5071,766
NetJ1_42: J1.42 J2.42 J3.42 J4.42 J5.17 | length 9589.1
  Top Layer w7.8: v1(234,915) 209.32,939.68 209.32,2590.32 v1(250.47,2631.47) ; v1(2277,1116) 2302,1091 v1(2302,959) ; v1(2375,1196) 2287,1284 2287,1673 2395.32,1781.32 2395.32,2580.48 2410.52,2595.68 2410.52,2656.63 2482.36,2728.46 J5.17 ; v1(4715,890) 4753.28,851.72 4840.5,851.72 J4.42
  Bottom Layer w7.8: v1(234,915) 236.94,917.94 340.84,917.94 J1.42 ; v1(250.47,2631.47) 592.53,2631.47 755.5,2794.44 2463.55,2794.44 J5.17 ; J2.42 1906.78,918 2261,918 ; v1(2277,1116) 2287.5,1116 2315.18,1088.32 2406.68,1088.32 2406.68,1164.32 v1(2375,1196) ; v1(2302,959) 2261,918 ; v1(4715,890) 3661,890 3633,918 3406.78,918 J3.42 3340.78,918 3208.36,918 3147.68,857.32 2472,857.32 2411.32,918 2261,918
NetJ1_43: J1.43 J2.43 J3.43 J4.43 J5.20 | length 11396.7
  Top Layer w7.8: J1.43 413,924.8 413,794.08 434.08,773 485,773 498.32,786.32 498.32,2604.32 v1(559,2665) 559,2636 519,2596 v1(519,1534) ; v1(2380,1534) 2514,1400 2514,1250 2551.09,1212.91 2551.09,1196 v1(2696,1196) ; v1(2916.35,1060.77) 2977.64,999.48 3100.66,999.48 3103.14,997 v1(3152.43,997) 3224,997 ; v1(3199,972) 3224,997 ; J3.43 3340.8,997 3224,997 ; v1(4701,1030.2) 4728.2,1003 4834.8,1003 J4.43
  Bottom Layer w7.8: v1(519,1534) 2003.64,1534 2029.32,1559.68 2084.68,1559.68 2110.36,1534 v1(2380,1534) ; v1(559,2665) 747,2853 1638.24,2853 1681.98,2896.73 1741,2896.73 ; J2.43 1906.76,997 2243.54,997 2271.02,1024.48 2681.99,1024.48 2694.99,1037.48 2801.79,1037.48 2840.55,998.72 2986.33,998.72 2987.09,999.48 3149.95,999.48 v1(3152.43,997) ; v1(2696,1196) 2760.32,1131.68 2760.32,1100 2775,1085.32 2830.75,1085.32 2855.3,1060.77 v1(2916.35,1060.77) ; v1(3199,972) 3237,1010 3473.2,1010 3498,1034.8 3498,1062.5 3511.5,1076 3656,1076 3701.8,1030.2 v1(4701,1030.2) ; 1741,2896.73 1743,2896.73 1751.73,2888 1771,2888 1779.73,2896.73 1800.09,2896.73 ; 1741,2896.73 1750.23,2887.5 1790.85,2887.5 1800.09,2896.73 ; 1800.09,2896.73 1841.64,2896.73 ; 1841.64,2896.73 1857.25,2896.73 1878.98,2875 1910.55,2875 J5.20 1891.8,2846.57 1841.64,2896.73
NetJ1_44: J1.44 J2.44 J3.44 J4.44 J5.21 | length 10168.5
  Top Layer w7.8: J2.44 1906.79,1076 1979,1076 1986,1069 1986,1024 2000,1010 2050,1010 2077.06,1037.06 2077.06,1141.32 2090.69,1154.94 2123.64,1154.94 2162.59,1116 v1(2194,1116) ; v1(2053.39,1889.49) 2053.39,1991.43 ; J5.21 2108,2795.66 2108,2708.44 2065,2665.44 2065,2302.36 2030.32,2267.68 2030.32,2014.5 2053.39,1991.43 ; v1(2274,1246) 2274,1770.82 v1(2260.82,1784) 2053.39,1991.43 ; v1(2379,1116) 2405.68,1142.68 3087.49,1142.68 3148.28,1081.89 3249.93,1081.89 3255.62,1076.2 3340.57,1076.2 J3.44 ; J4.44 4913.79,1083 5038,1083 5071,1050 5071,1005 v1@5069,1003
  Bottom Layer w7.8: J1.44 340.79,1010 275,1010 236.5,1048.5 236.5,1338.54 249.3,1351.34 249.3,1389.3 479.64,1619.64 1783.53,1619.64 v1(2053.39,1889.49) ; v1(2194,1116) 2250.22,1172.22 2250.22,1222.22 v1(2274,1246) 2379,1141 v1(2379,1116) ; v1(2260.82,1784) 4919.04,1784 5155.74,1547.3 5155.74,1037.74 5121,1003 v1@5069,1003
  other v1: 5071,1004
NetJ1_45: J1.45 J2.45 J3.45 J4.45 J5.18 | length 14062.8
  Top Layer w7.8: v1(343,2749) 343,2689 ; J1.45 340.84,1154.94 340.84,1399.2 390,1448.36 390,2137.5 414.68,2162.18 414.68,2211.68 343,2283.36 343,2689 ; v1(440.57,2846.57) 1616.21,2846.57 ; v1(1593,3096) 1580.74,3083.74 1580.74,2882.04 1616.21,2846.57 ; J5.18 1616.21,2846.57 ; J2.45 1845.44,1122.01 1812.5,1089.07 1652.93,1089.07 1601,1141 637.59,1141 623.64,1154.94 590.06,1154.94 577,1168 577,1519 603,1545 603,2693 550,2746 400,2746 343,2689 ; v1(3688.57,1089) 3990.11,1089 4013.29,1112.18 4587.5,1112.18 ; v1(4597,962) 4571.82,987.18 4571.82,1096.5 4587.5,1112.18 ; J4.45 4834.77,1083 4778,1083 4748.82,1112.18 4587.5,1112.18
  Bottom Layer w7.8: v1(343,2749) v1(440.57,2846.57) ; v1(1593,3096) 1603,3106 4113,3106 5195,2024 5195,968 5145,918 4952,918 4939,931 4628,931 v1(4597,962) ; J3.45 3405.94,1122.01 3438.88,1154.94 3472.06,1154.94 3498,1129 3498,1103.5 3512.5,1089 v1(3688.57,1089)
NetJ1_46: J1.46 J2.46 J3.46 J4.46 J5.19 | length 9924
  Top Layer w7.8: J5.19 1872,2795.44 ; v1(1854,1447.04) 1829,1472.04 1829,2665.66 1872,2708.66 1872,2795.44 ; J2.46 1900.72,1217.88 1917.1,1234.26 2044.26,1234.26 2064.26,1254.26 2064.26,1404.75 2026.45,1442.57 2026.45,1542.21 1947.87,1620.79 1947.87,2650.82 1989.14,2692.08 1989.14,2750 1960.51,2778.62 1888.82,2778.62 1872,2795.44 ; v1(3226,1421) 3240,1407 3300,1407 3328,1379 3328,1246.76 J3.46 ; v1(3747,1477) 3756,1477 3911,1322 4800,1322 4828,1294 4828,1246.76 J4.46
  Bottom Layer w7.8: J1.46 340.84,1233.92 340.84,1396 411.52,1466.68 1884.68,1466.68 1904.36,1447 ; v1(1854,1447.04) 1904.36,1447 ; v1(3747,1477) 3432,1477 3385.4,1430.4 3235.4,1430.4 v1(3226,1421) 3175.33,1421 3150.33,1446 ; 1904.36,1447 3150.33,1446 ; 1904.36,1447 1905.36,1446 3150.33,1446
NetJ1_47: J1.47 J2.47 J3.47 J4.47 J5.11 | length 6705.1
  Top Layer w7.8: J5.11 1812,2719.6 1812,1654.13 1779,1621.13 1779,1425 1840,1364 1840,1280 J2.47 1873.78,1301.59 1913,1340.81 v1(1913,1411) ; J3.47 3406.78,1313 3406.78,1410.78 v1(3432,1436) ; J4.47 4906.72,1312.94 4906.72,1408.28 v1(4879,1436)
  Bottom Layer w7.8: J1.47 373.78,1310.25 406.78,1343.25 406.78,1368.78 468.35,1430.35 681.34,1430.35 700.69,1411 1867.44,1411 1867.44,1417.55 v1@1913,1417.55 ; v1(1913,1411) v1@1913,1417.55 ; v1(4879,1436) 4872.52,1442.48 3740.68,1442.48 3719.68,1463.48 3459.48,1463.48 v1(3432,1436) 3413.6,1417.6 3263.58,1417.6 3239.3,1393.32 3198.32,1393.32 3186.12,1405.52 2194.14,1405.52 2182.1,1417.55 v1@1913,1417.55
NetJ1_48: J1.48 J2.48 J3.48 J4.48 J5.12 | length 7539.8
  Top Layer w7.8: v1(1807,1439) J2.48@1873.78,1372.22 ; J2.48 J2.48@1873.78,1372.22 ; v1(1907.8,1572.48) 1907.8,1451.12 1873.78,1417.1 J2.48@1873.78,1372.22 ; v1(1914,1927) 1914,2563 1931,2580 1931,2720.49 J5.12 ; v1(3322,1486) 3322,1436 3373.78,1384.22 J3.48 ; v1(3665,1571) 3731.32,1504.68 3763.6,1504.68 3873.28,1395 4837.8,1395 J4.48
  Bottom Layer w7.8: J1.48 465.76,1451 698,1451 710,1439 v1(1807,1439) ; v1(1907.8,1572.48) 2143.52,1572.48 ; v1(1914,1927) 2081.07,1918.93 2081.07,1634.93 2143.52,1572.48 ; 3251,1572.48 2143.52,1572.48 ; v1(3665,1571) 3663.52,1572.48 3617.48,1572.48 3575,1530 3366,1530 v1(3322,1486) 3322,1500 3277,1545 3251,1571 2145,1571 2143.52,1572.48
NetJ1_49: J1.49 J2.49 J3.49 J4.49 J5.35 | length 10137.2
  Top Layer w7.8: J1.49 394.04,391 v1(419,391) ; v1(1828,417) 1843,432 3280.04,432 v1(3295,417.04)
  Bottom Layer w7.8: J1.49 262.1,522.94 262.1,790 174,878.1 174,2100 223.32,2149.32 312.64,2149.32 375,2211.68 2075.68,2211.68 2295.32,2431.32 2960.73,2431.32 J5.35 ; v1(419,391) 419.58,391.58 419.58,505.02 437.5,522.94 475.06,522.94 498,500 498,471.56 512.5,457.06 643,457.06 674.48,488.55 1404.27,488.55 1504,588.28 1612.16,588.28 1644.46,555.98 1672.7,555.98 1738.68,490 J2.49 1828,457.04 v1(1828,417) ; v1(3295,417.04) 3295.04,417.08 J3.49 3327.98,457.06 3389.06,457.06 3407,475 3407,511 3419,523 3466.1,523 3498,491.1 3498,471.5 3512.5,457 3895.64,457 4013.12,339.52 4782.2,339.52 4842.68,400 4842.68,442.36 J4.49
NetJ1_50: J1.50 J2.50 J3.50 J4.50 J5.36 | length 12101.2
  Top Layer w7.8: v1(178.98,569.02) 237.02,569.02 ; v1(208,354) 310,252 559,252 v1(699,392) ; v1(208.32,530) 208.32,533.56 224.56,549.8 224.56,556.56 237.02,569.02 ; J1.50 237.02,569.02 ; v1(1596.68,537.68) 1628.02,569.02 1690.02,569.02 ; v1(1628.55,499.58) 1628.55,504.93 1633,509.37 1633,512 1690.02,569.02 ; J2.50 1690.02,569.02 ; v1(2945,2944) 3022,2867 3167.99,2867 3197.73,2896.73 3239.28,2896.73 3277.56,2858.46 J5.36 ; v1(2951,389) 3121,219 4359,219 v1(4525,385) ; v1(2951,535) 2965,535 2999.02,569.02 J3.50 ; v1(4525,493) v1(4649.06,617.06)
  Bottom Layer w7.8: v1(178.98,569.02) 101,647 101,2600 560,3059 2830,3059 v1(2945,2944) ; v1(208,354) 208.16,354.16 208.16,529.84 v1(208.32,530) ; v1(699,392) 1431,392 1505.21,466.21 1505.21,525.18 1516.32,536.29 1516.32,550 1529,562.68 1559,562.68 1584,537.68 v1(1596.68,537.68) ; v1(1628.55,499.58) 1628.55,494.23 1633,489.79 1633,483 1702,414 1775.64,414 1800.32,389.32 2875.32,389.32 2951,465 ; v1(2951,389) 2951,465 ; v1(2951,535) 2951,465 ; v1(4525,385) v1(4525,493) ; v1(4649.06,617.06) 4718.9,617.06 4766.94,569.02 J4.50
NetJ1_51: J1.51 J2.51 J3.51 J4.51 J5.37 | length 13744.2
  Top Layer w7.8: J1.51 235.73,647.99 138.52,745.2 138.52,2569.71 247.81,2679 274,2679 290,2663 290,2096 297,2089 v1(297,1945) ; J3.51 3327.2,647.99 3360.19,615 3550,615 3577.06,642.06 3577.06,661.64 3596.36,680.93 3623.64,680.93 3639.89,664.68 4778.35,664.68 J4.51 4715,567.95 v1(4715,540) ; v1(3395.32,2104.32) 3395.32,2201.33 3395.67,2201.68 J5.37 ; v1(4765,417) 5100,417 5214,531 5214,1712 v1(5116,1810)
  Bottom Layer w7.8: v1(297,1945) 1515,1945 1599.77,2029.77 2955.06,2029.77 2973.97,2010.86 3301.86,2010.86 v1(3395.32,2104.32) 3667.44,1832.2 5093.8,1832.2 v1(5116,1810) ; J2.51 1828.05,681 1978,681 1998,661 1998,632.5 2015.44,615.06 2143,615.06 2190.62,662.68 3249.68,662.68 3264.37,647.99 J3.51 ; v1(4715,540) 4749.3,505.7 4749.3,432.7 v1(4765,417)
NetJ1_52: J1.52 J2.52 J3.52 J4.52 J5.38 | length 15427
  Top Layer w7.8: J1.52 295.04,698.46 328,665.5 328,630.5 ; v1(387,2184) 387,2207.02 320,2274.02 320,2675 286,2709 230,2709 125.72,2604.72 125.72,730.6 241.32,615 312.5,615 328,630.5 ; v1(471,405) 439,437 373,437 328,482 328,630.5 ; v1(728,823) 1171,823 v1(1244,750) ; J2.52 1834.03,766 2050,766 2077.06,793.06 2077.06,898.64 2096.36,917.94 2123.64,917.94 2212.9,828.68 2268.53,828.68 2370.2,727.01 J3.52 ; v1(4698,727.01) J4.52
  Bottom Layer w7.8: J1.52 315,746.97 315,765.31 340,790.31 340,825 354,839 712,839 v1(728,823) ; v1(387,2184) 2227,2184 2455,2412 3295.74,2412 J5.38 ; v1(471,405) 471,373.52 524.52,320 3260.06,320 3333.06,247 4511.22,247 4532.44,225.79 4818.79,225.79 5064.2,471.2 5064.2,587.8 5038,614 5014,614 4986,642 4986,662.5 4967.5,681 4744.01,681 v1(4698,727.01) ; v1(1244,750) 1266.99,727.01 J2.52
NetJ1_53: J1.53 J2.53 J3.53 J4.53 J5.39 | length 15025
  Top Layer w7.8: v1(269,2046) 236.5,2013.5 236.5,1102 262.5,1076 314.5,1076 328,1062.5 328,838.94 J1.53 340.78,760.25 340.78,712.5 359.55,693.73 419.52,693.73 432.32,680.93 623.64,680.93 650.57,654 v1(807.96,654) ; v1(875.96,722) 1711.06,722 J2.53 ; J3.53 3341.02,760 3562.5,760 3577,774.5 3577,898.58 3596.36,917.94 3629.31,917.94 3741.25,806 ; J5.39 3676.04,2630.04 3728,2682 3785,2678 3829.53,2678 3984.53,2833 v1(4447,2833) ; v1(4212,375) 4267,430 4593.32,430 4623.32,400 4623.32,337.68 4765.69,195.31 5032.31,195.31 v1(5246,409) ; v1(4212,485) 4295,485 v1(4442,632) ; v1(4532,722) 3679.32,722 3643,758.32 3643,805 3675,837 3694,837 3725,806 3741.25,806 ; v1(4636.21,816.97) 4615.71,837.48 4261.77,837.48 4230.29,806 3741.25,806 ; v1@4637,818 4640.53,818 4652.55,805.98 J4.53
  Bottom Layer w7.8: v1(269,2046) 296,2073 2986.77,2073 3002.38,2088.61 3090.46,2088.61 J5.39 ; v1(807.96,654) v1(875.96,722) ; v1(4212,375) v1(4212,485) ; v1(4442,632) v1(4532,722) ; v1(4447,2833) 5246,2034 v1(5246,409) ; v1(4636.21,816.97) 4641.56,816.97 4652.55,805.98 J4.53
NetJ1_54: J1.54 J2.54 J3.54 J4.54 J5.40 | length 16627.6
  Top Layer w7.8: v1(179,798) 266,885 J1.54 ; v1(2578,1114) 2695,997 v1(2720,997) ; v1(2916,891) v1(3004,803) ; v1(2978,1269) 3014,1305 v1(3014,2052) ; v1(3195,840) 3240,885 J3.54
  Bottom Layer w7.8: v1(179,798) 236,741 236,302 446,92 5141,92 5182,133 5182,790 5120,852 4828.04,852 J4.54 ; J2.54 1762.1,852.06 327.98,852.06 J1.54 221,885 198.1,907.9 198.1,2092.1 230.32,2124.32 372,2124.32 414.68,2167 2420,2167 2620,2367 3337.12,2367 3564,2593.88 3564,2633.09 3611.91,2681 3658.5,2681 3709.46,2630.04 J5.40 3195.77,2075.81 3037.81,2075.81 v1(3014,2052) ; v1(2578,1114) 2578,1170 2677,1269 v1(2978,1269) ; v1(2720,997) 2789,928 2879,928 v1(2916,891) ; v1(3004,803) 3021.68,785.32 3140.32,785.32 v1(3195,840)
NetJ1_55: J1.55 J2.55 J3.55 J4.55 J5.41 | length 12295.7
  Top Layer w7.8: v1(1331,1196) 1331,1880 v1(1468,2017) ; v1(1595,1103) 1570,1128 1528.82,1128 1513.32,1112.5 1513.32,1050 1599.3,964.02 J2.55 ; v1(2806,1196) 2820.68,1181.32 2925,1181.32 2950.32,1206.64 2950.32,2030.32 3000,2080 3049,2080 v1(3081,2048) ; v1(2883,1101) 2883,1050 2946.32,986.68 3090,986.68 3132.68,944 3275.02,944 J3.55 ; J5.41 4410,2088.15 v1(4410,1662) ; v1(4599.5,1084.5) 4719.98,964.02 J4.55
  Bottom Layer w7.8: J1.55 223.7,1035.35 223.7,1351.34 236.5,1364.14 236.5,1952.2 326.87,2042.57 1493.57,2042.57 ; v1(1331,1196) 1399,1128 1570,1128 v1(1595,1103) ; v1(1468,2017) 1493.57,2042.57 ; v1(2806,1196) 2883,1119 v1(2883,1101) ; v1(3081,2048) 3212,2048 3666,2502 3696,2502 ; J5.41 3740.07,2502 3696,2502 ; v1(4410,1662) 4893,1662 5077,1478 5077,1090.5 5075.23,1088.73 5004.55,1088.73 4991.82,1076 4608,1076 v1(4599.5,1084.5) ; 1493.57,2042.57 2967.86,2042.57 2986.77,2023.66 3217.66,2023.66 3696,2502
NetJ1_56: J1.56 J2.56 J3.56 J4.56 J5.42 | length 10140.1
  Top Layer w7.8: v1(237,2202) 223.7,2188.7 223.7,1074.09 254.8,1042.99 J1.56 ; v1(1541,1095) 1580.05,1055.95 1658.37,1055.95 1701,1013.32 1765.37,1013.32 J2.56 ; v1(3008,1113) 3076.09,1113 3120,1069.09 3243,1069.09 3269.1,1042.99 J3.56 ; v1(3031,1196) 3006.32,1220.68 3006.32,1273.68 3031,1298.36 3031,1450 3218.5,1637.5 J5.42
  Bottom Layer w7.8: v1(237,2202) 237,2216.25 278.08,2257.32 415.12,2257.32 625.79,2468 2478.57,2468 2497.64,2487.07 2754.52,2487.07 2995.91,2728.46 J5.42 ; J1.56 328.05,1076 375,1076 419.58,1120.58 419.58,1137.5 437.03,1154.94 1313.06,1154.94 1357,1111 1525,1111 v1(1541,1095) ; v1(3031,1196) 3008,1173 v1(3008,1113) 3006,1115 3006,1274 3064,1274 3080,1258 3179,1258 3269,1168 3780,1168 3892,1056 4671,1056 4673,1058 4780.03,1058 J4.56
NetJ1_57: J1.57 J2.57 J3.57 J4.57 | length 7239.8
  Top Layer w7.8: v1(1671.88,1128) 1677.88,1122.01 J2.57 ; v1(3138,1209) 3138,1428 v1(3178,1468) 3365,1655 3456.57,1655 3865.57,1246 v1(4504,1246)
  Bottom Layer w7.8: v1(1671.88,1128) 1631.88,1168 1405.68,1168 1350,1223.68 1303.32,1223.68 1247.38,1167.74 419.53,1167.74 406.78,1155 328.03,1155 J1.57 249.3,1167.74 249.3,1325 262.1,1337.8 262.1,1379.06 383.05,1500 1917.86,1500 1949.53,1468.32 2548.73,1468.32 2563.61,1483.2 3162.8,1483.2 v1(3178,1468) ; v1(3138,1209) 3224.99,1122.01 J3.57 ; v1(4504,1246) 4625.02,1124.98 4652.21,1124.98 J4.57
NetJ1_58: J1.58 J2.58 J3.58 J4.58 | length 7409.9
  Top Layer w7.8: J1.58 262.1,1233.92 262.1,1306.12 249.3,1318.92 249.3,1404.75 262.1,1417.55 262.1,1839.1 v1(340,1917) ; v1(1725,1968) 1706.64,1949.64 v1(1706.64,1917) 1706.64,1289.38 J2.58 ; J3.58 3275.06,1181 3125,1181 3109,1197 3109,1442.72 3417,1750.72 ; v1(3417,1968) 3417,1750.72 ; v1(4632,1279) 3851.73,1279 3417,1713.73 3417,1750.72
  Bottom Layer w7.8: v1(340,1917) v1(1706.64,1917) ; v1(1725,1968) 1773.97,2016.97 2942.26,2016.97 2991.23,1968 v1(3417,1968) ; v1(4632,1279) 4710.02,1200.98 J4.58
NetJ1_59: J1.59 J2.59 J3.59 J4.59 | length 6003.6
  Top Layer w7.8: v1(295,1566) 295,1411.95 262.1,1379.06 262.1,1332.4 282,1312.5 282,1293.04 J1.59 ; v1(1753,1650) 1753,1349.04 1795.04,1307 J2.59 1828.04,1247 1891.5,1247 1907,1262.5 1907,1300 1920,1313 1962.5,1313 1986,1336.5 1986,1471 v1(1961,1496) ; v1@3230.23,1468.73 3393.68,1639.79 3396.09,1642.2 3447.8,1642.2 3885,1205 4720.04,1205 J4.59 ; v1(3231,1468) 3198,1435 3198,1377.04 J3.59
  Bottom Layer w7.8: v1(295,1566) 379,1650 v1(1753,1650) ; v1(1961,1496) 1963.48,1493.52 2417.23,1493.52 2419.71,1496 3203,1496 v1(3231,1468)
NetJ1_60: J1.60 J2.60 J3.60 J4.60 | length 5047.7
  Bottom Layer w7.8: J1.60 295.04,1332.98 262.1,1300.04 262.1,1180.85 274.91,1168.05 387.55,1168.05 406.78,1187.28 406.78,1308.75 423.77,1325.74 473.74,1325.74 485.52,1337.52 485.52,1390.28 500,1404.75 642.06,1404.75 674.86,1371.95 1380.17,1371.95 1393.11,1359.02 J2.60 1828.06,1326 1975,1326 1998,1349 1998,1377.45 2012.5,1391.95 2143,1391.95 2160.52,1374.43 3116.34,1374.43 3131.75,1359.02 J3.60 3328.02,1392 4762.06,1392 J4.60
pads on no net: J5.

## Polygon pours and split planes (outlines as drawn)
GND on Top Layer "GND_L01_P000" (solid, pour order 0): 0,0 5500,0 5500,3430 5490,3420 0,3420
GND on Bottom Layer "GND_L02_P001" (solid, pour order 1): 5520,0 5565,45 5565,3480 5,3480 0,3475 0,0

## Silkscreen, mask and mechanical layers (free items; w line width, h text height)
Top Overlay:
  drawing of 103 lines, arcs and shapes, not listed
  text "Daniel Hoefer / Backplane / REV 3.0 / 2/4/2023" at 4502,2789.27 h39.37
Bottom Overlay:
  drawing of 22 lines, arcs and shapes, not listed
  text "Daniel Hoefer / Backplane / REV 3.0 / 2/4/2023" at 1007.2,2789.71 h39.37
Mechanical 1:
  the board outline again, w10